# Altium PCB uStepper.PcbDoc (part 2 of 2)
Units mm, origin at the board's own origin, x right, y up, seen from the top; angles counter-clockwise.
Board outline 41.8 x 41.8 mm, 4 copper layers (Top Layer, GND, Vcc, Bottom Layer), stack 1.62 mm thick; 84 components, 62 nets, 292 pads, 387 vias.
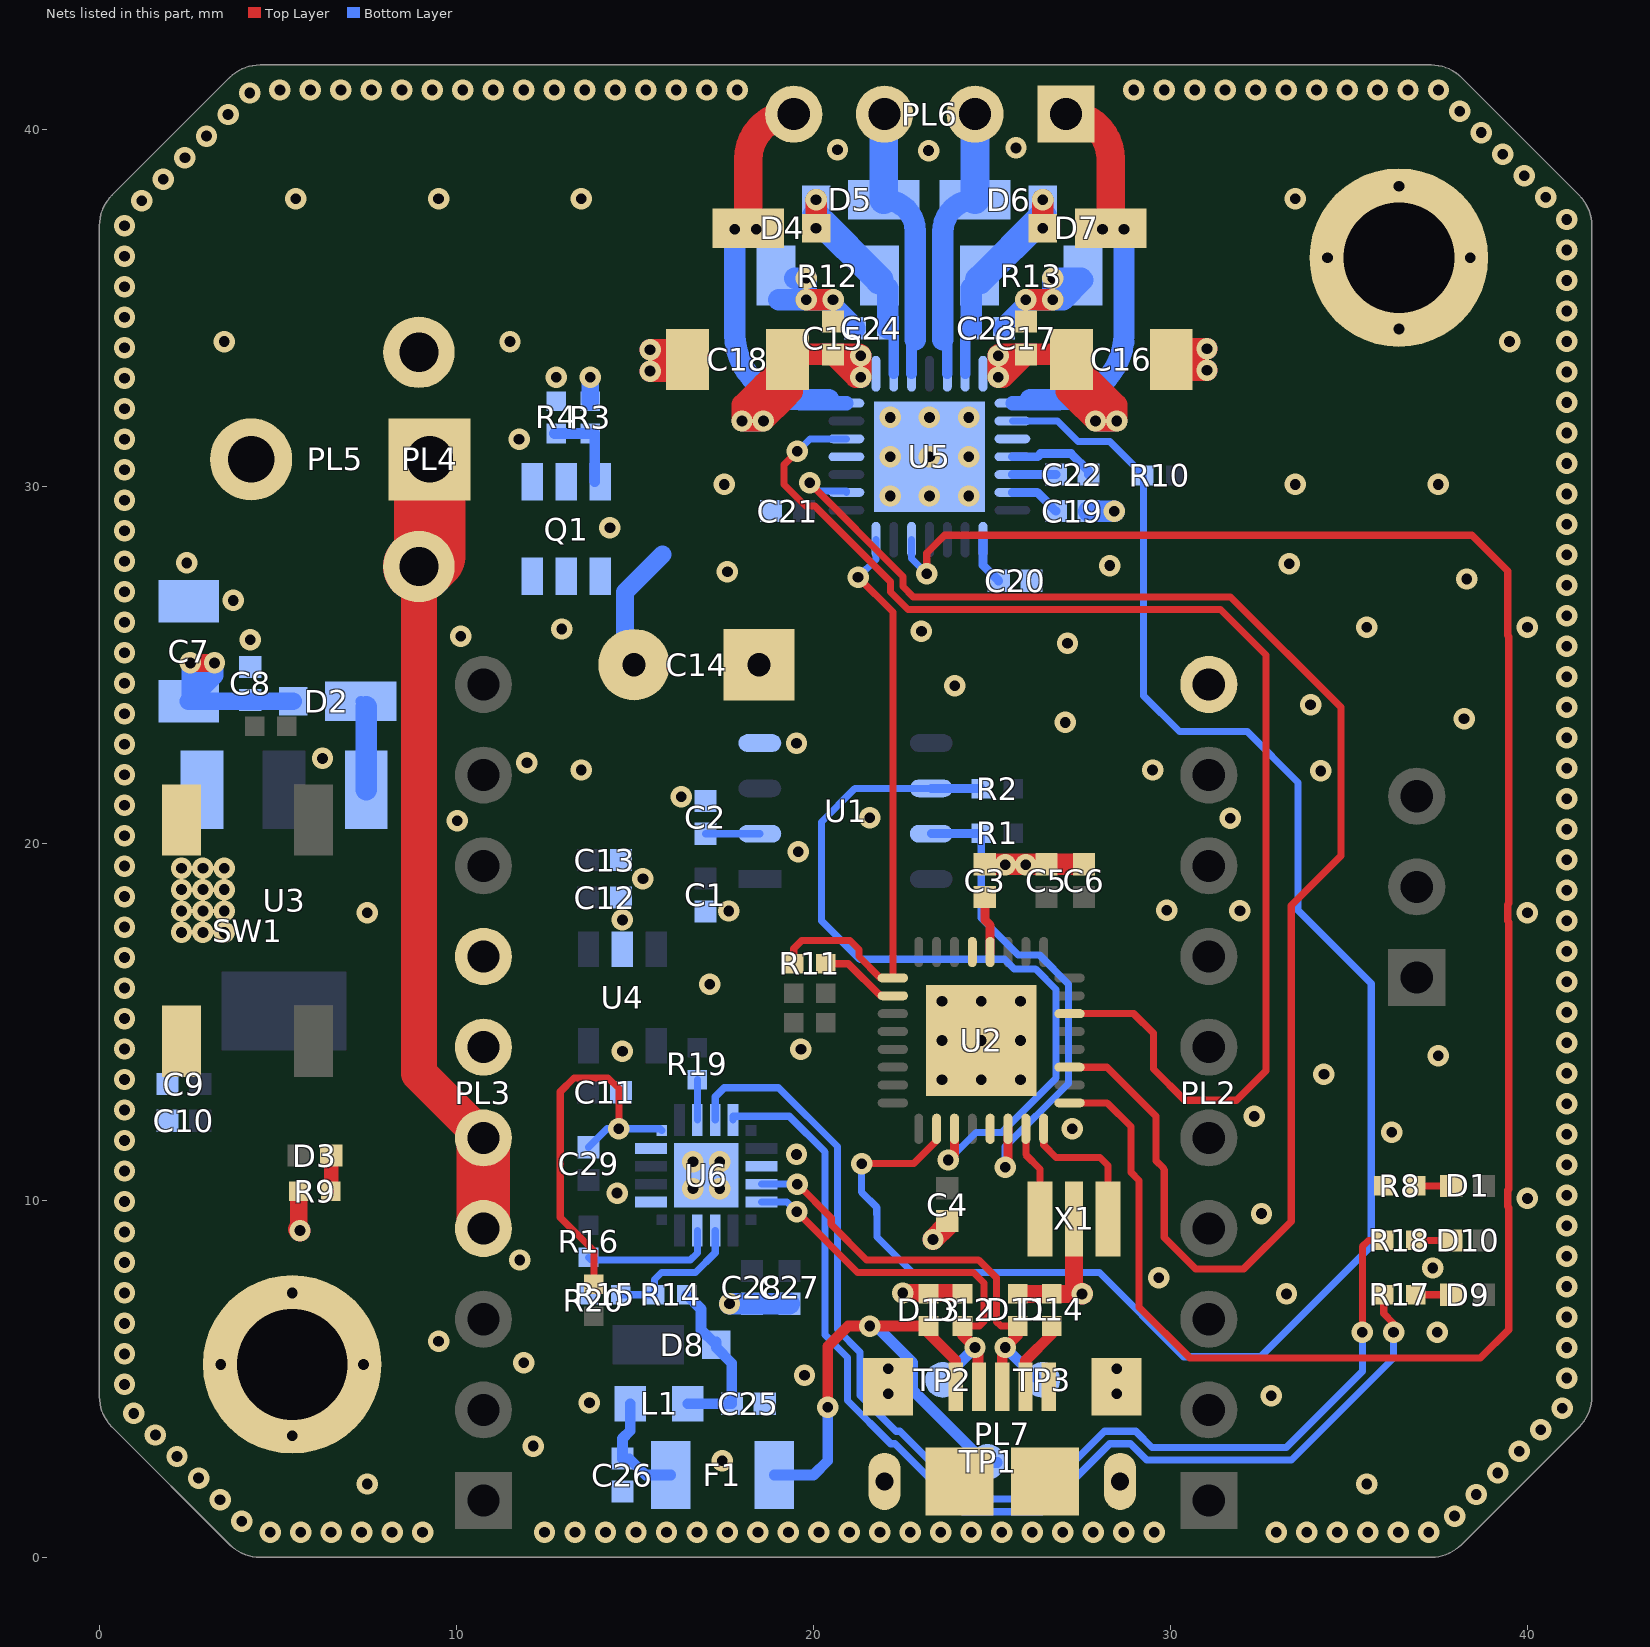
[diagram p4: the nets of this part, all layers, seen from the top]

## Via types
v1: diameter 0.6, hole 0.3, Top Layer to Bottom Layer, tented both sides, 352 vias
v2: diameter 0.6, hole 0.3, Top Layer to Bottom Layer, 18 vias
v3: diameter 0.6, hole 0.3, Top Layer to Bottom Layer, tented bottom, 13 vias
v4: diameter 0.6, hole 0.3, Top Layer to Bottom Layer, tented top, 4 vias

## Nets (pads, with @x,y where several pads share a name; then routed paths per layer and width w, separated by ;. In a path a pad name is that pad's centre, name@x,y a point inside that pad or via, vN(x,y) a via of type N, cw(c..) or ccw(c..) an arc to the next point about the centre after c; other vN are vias at no path point) (continued)
DIR: U2.14 U5.19 | length 37.3
  Top Layer w0.2: v1(19.55,30.974) 19.175,30.599 19.175,30.043 19.775,29.443 20.038,29.443 22.158,27.322 22.158,27.039 22.651,26.547 31.402,26.547 32.677,25.272 32.677,13.627 31.85,12.799 30.4,12.799 29.523,13.677 29.523,14.677 28.975,15.224 U2.14@27.175,15.224
  Bottom Layer w0.2: v1(19.55,30.974) 19.9,31.324 U5.19@20.925,31.324
ENA: R10.1 U2.2 U5.2 | length 51.1
  Top Layer w0.2: v1(21.35,11.024) 22.809,11.024 23.45,11.665 U2.2@23.45,11.999
  Bottom Layer w0.2: v1(21.35,11.024) 21.35,10.224 21.775,9.799 21.775,9.605 21.777,9.603 21.777,8.972 22.775,7.974 28.013,7.974 30.375,5.613 32.523,5.613 35.625,8.715 35.625,16.071 33.575,18.121 33.575,21.699 32.15,23.124 30.25,23.124 29.25,24.124 R10.1@29.25,30.299 28.302,31.247 27.413,31.247 26.836,31.824 U5.2@25.575,31.824
GND: C1.1 C2.1 C3.1 C4.2 C5.1 C6.1 C7.1 C8.1 C9.1 C10.1 C11.1 C12.1 C13.1 C14.2 C15.1 C16.2 C17.1 C18.2 C20.1 C21.1 C23.1 C24.1 C25.1 C26.1 C27.1 C28.1 D11.1 D12.1 D13.1 D14.1 pad.1 pad.3 PL2.10 PL3.6 PL3.7 PL5.2 PL5.3 PL7.5 PL7.6 PL7.7 PL7.8 PL7.9 PL7.10 PL7.11 R4.1 R8.1 R9.1 R12.1 R13.1 R15.1 SW1.3 SW1.4 U1.4 U2.5 U2.21 U2.33 U3.1 U4.2 U5.3 U5.18 U5.29 U6.3 U6.12 U6.15 U6.21 X1.2 | length 28
  Top Layer w0.2: U2.33@24.45,14.724 v3(24.7,14.474) U2.33@24.95,14.224
  Top Layer w0.5: v1@5.585,9.182 R9.1@5.585,10.249 ; v1(22.5,7.399) 24.15,7.399 D12.1@24.175,7.374 ; D11.1@25.725,7.374 v1(27.525,7.374) 27.3,7.599 X1.2@27.3,9.474
  Top Layer w0.6: v1@5.585,9.182 v1(5.618,9.149) ; v1(15.425,33.224) 16.15,33.224 C18.2@16.475,33.549 16.2,33.824 v1(15.425,33.824) ; v1(19.8,35.224) v1(20.55,35.224) ; v1(23.35,8.899) 23.75,9.299 C4.2@23.75,9.414 ; C3.1@24.8,19.409 C6.1@27.574,19.409 ; v1(25.95,35.224) v1(26.7,35.224) ; v1(31.025,33.249) 30.325,33.249 C16.2@30.025,33.549 30.325,33.849 v1(31.025,33.849)
  Bottom Layer w0.6: v1(17.65,7.099) C28.1@18.277,7.099 C27.1@19.327,7.099 ; R12.1@19.025,35.224 v1(19.8,35.224) ; R12.1@19.475,35.824 v1(19.8,35.824) v1(19.8,35.224) ; C24.1@21.165,34.424 20.55,35.039 v1(20.55,35.224) v1(19.8,35.224) ; v3(22.1,4.574) v3(22.1,5.274) ; C23.1@25.335,34.424 25.95,35.039 v1(25.95,35.224) v1(26.7,35.224) ; v3(28.5,4.574) v3(28.5,5.274) ; v1(26.7,35.224) v1(26.7,35.824) 27.5,35.824 27.55,35.774 27,35.224 v1(26.7,35.224)
  other v1: 4.782,0.702 5.636,0.702 6.49,0.702 7.344,0.702 8.198,0.702 9.052,0.702 12.468,0.702 13.322,0.702 14.176,0.702 15.03,0.702 15.884,0.702 16.738,0.702 17.592,0.702 18.446,0.702 19.3,0.702 20.154,0.702 21.008,0.702 21.862,0.702 22.716,0.702 23.57,0.702 24.424,0.702 25.278,0.702 26.132,0.702 26.986,0.702 27.84,0.702 28.694,0.702 29.548,0.702 32.964,0.702 33.818,0.702 34.672,0.702 35.526,0.702 36.38,0.702 37.234,0.702 3.985,1.008 37.96,1.152 3.381,1.612 38.563,1.756 7.5,2.049 35.5,2.049 2.777,2.215 39.167,2.36 17.45,2.699 2.173,2.819 39.771,2.964 12.15,3.111 1.569,3.423 40.375,3.567 0.965,4.027 40.979,4.171 13.725,4.324 32.825,4.524 0.702,4.839 41.098,5.017 19.75,5.099 11.889,5.449 0.702,5.693 41.098,5.871 9.5,6.049 37.475,6.299 0.702,6.547 41.098,6.725 33.25,7.374 0.702,7.401 41.098,7.579 29.675,7.824 37.35,8.099 0.702,8.255 11.775,8.324 41.098,8.433 0.702,9.109 41.098,9.287 32.55,9.624 0.702,9.963 40,10.049 41.098,10.141 14.5,10.199 0.702,10.817 41.098,10.995 19.525,11.281 0.702,11.671 41.098,11.849 36.2,11.899 27.25,11.999 32.35,12.349 0.702,12.525 41.098,12.703 0.702,13.379 34.3,13.524 41.098,13.557 37.5,14.049 14.65,14.174 0.702,14.233 19.65,14.224 41.098,14.411 0.702,15.087 41.098,15.265 0.702,15.941 17.1,16.049 41.098,16.119 0.702,16.795 41.098,16.973 2.3,17.499 2.9,17.499 3.5,17.499 0.702,17.649 41.098,17.827 14.65,17.849 7.5,18.049 40,18.049 2.3,18.099 2.9,18.099 3.5,18.099 17.625,18.099 29.9,18.124 31.947,18.109 0.702,18.503 41.098,18.681 2.3,18.699 2.9,18.699 3.5,18.699 15.225,18.999 2.3,19.299 2.9,19.299 3.5,19.299 0.702,19.357 25.375,19.399 25.95,19.399 41.098,19.535 19.575,19.763 0.702,20.211 41.098,20.389 10.025,20.624 21.575,20.71 31.675,20.699 0.702,21.065 41.098,21.243 16.3,21.299 0.702,21.919 34.214,22.024 13.5,22.049 29.5,22.049 41.098,22.097 11.975,22.249 6.25,22.374 0.702,22.773 19.525,22.799 41.098,22.951 27.05,23.382 38.225,23.485 0.702,23.627 41.098,23.805 33.925,23.875 23.962,24.406 0.702,24.481 41.098,24.659 0.702,25.335 41.098,25.513 27.116,25.599 4.225,25.699 10.125,25.799 23.025,25.938 12.95,25.999 35.5,26.049 40,26.049 0.702,26.189 41.098,26.367 3.75,26.799 0.702,27.043 41.098,27.221 38.3,27.399 17.591,27.599 28.3,27.775 33.325,27.824 2.45,27.849 0.702,27.897 41.098,28.075 0.702,28.751 14.3,28.837 41.098,28.929 0.702,29.605 41.098,29.783 17.5,30.049 33.5,30.049 37.5,30.049 0.702,30.459 41.098,30.637 0.702,31.313 11.755,31.313 41.098,31.491 0.702,32.167 41.098,32.345 0.702,33.021 12.8,33.049 41.098,33.199 0.702,33.875 3.5,34.049 11.5,34.049 39.5,34.049 41.098,34.053 0.702,34.729 41.098,34.907 0.702,35.583 41.098,35.761 0.702,36.437 41.098,36.615 0.702,37.291 41.098,37.469 1.188,37.994 5.5,38.049 9.5,38.049 13.5,38.049 33.5,38.049 40.514,38.092 1.792,38.598 39.91,38.696 2.396,39.202 39.306,39.3 23.225,39.399 20.675,39.424 25.675,39.474 3,39.806 38.702,39.904 3.603,40.409 38.1,40.499 4.207,41.013 5.057,41.097 5.911,41.097 6.765,41.097 7.619,41.097 8.473,41.097 9.327,41.097 10.181,41.097 11.035,41.097 11.889,41.097 12.743,41.097 13.597,41.097 14.451,41.097 15.305,41.097 16.159,41.097 17.013,41.097 17.867,41.097 28.969,41.097 29.823,41.097 30.677,41.097 31.531,41.097 32.385,41.097 33.239,41.097 34.093,41.097 34.947,41.097 35.801,41.097 36.655,41.097 37.509,41.097
  other v2: 5.4,3.399 3.4,5.399 7.4,5.399 5.4,7.399 22.15,29.724 23.25,29.724 24.35,29.724 22.15,30.824 23.25,30.824 24.35,30.824 22.15,31.924 23.25,31.924 24.35,31.924 36.4,34.399 34.4,36.399 38.4,36.399 36.4,38.399
  other v3: 23.6,13.374 24.7,13.374 25.8,13.374 23.6,14.474 25.8,14.474 23.6,15.574 24.7,15.574 25.8,15.574
  other v4: 16.625,10.324 17.375,10.324 16.625,11.074 17.375,11.074
INDEX: U2.9 U5.12 | length 58.3
  Top Layer w0.2: v1(23.175,27.549) 23.175,28.124 23.675,28.624 38.45,28.624 39.448,27.627 39.448,25.82 39.475,25.793 39.475,18.305 39.448,18.278 39.448,17.82 39.475,17.793 39.475,10.305 39.448,10.278 39.448,9.82 39.475,9.793 39.475,6.371 38.688,5.584 30.54,5.584 29.123,7.002 29.123,10.553 28.893,10.783 28.893,12.06 28.228,12.724 U2.9@27.175,12.724
  Bottom Layer w0.2: U5.12@22.75,28.499 22.75,27.974 v1(23.175,27.549)
NetC2_2: C2.2 U1.2 | length 1.5
  Bottom Layer w0.2: C2.2@16.975,20.264 U1.2@18.5,20.264
NetC3_2: C3.2 U2.20 | length 1.6
  Top Layer w0.25: C3.2@24.8,18.489 24.8,17.849 24.95,17.699 U2.20@24.95,16.949
NetC19_2: C19.2 U5.6 | length 1.4
  Bottom Layer w0.25: U5.6@25.575,29.824 26.265,29.824 C19.2@26.79,29.299
NetC20_2: C20.2 U5.8 | length 1.3
  Bottom Layer w0.25: U5.8@24.75,28.499 24.75,27.789 C20.2@25.19,27.349
NetC22_1: C22.1 U5.4 | length 2.5
  Bottom Layer w0.25: U5.4@25.575,30.824 26.278,30.824 26.365,30.912 27.215,30.912 27.71,30.417 C22.1@27.71,30.324
NetC22_2: C22.2 U5.5 | length 1.2
  Bottom Layer w0.25: U5.5@25.575,30.324 C22.2@26.79,30.324
NetC23_2: C23.2 D6.1 D7.1 R13.2 U5.27 | length 7
  Top Layer w0.6: v1(26.425,37.224) v1(26.425,38.024)
  Bottom Layer w0.3: U5.27@24.25,33.149 C23.2@24.25,34.549
  Bottom Layer w0.6: C23.2@24.415,34.424 24.415,35.539 R13.2@24.65,35.774 ; v1(26.425,37.224) 26.425,37.549 v1(26.425,38.024)
  Bottom Layer w0.8: R13.2@24.65,35.774 26.425,37.549
NetC24_2: C24.2 D4.1 D5.1 R12.2 U5.23 | length 7.1
  Top Layer w0.6: v1(20.075,37.224) v1(20.075,38.024)
  Bottom Layer w0.3: U5.23@22.25,33.149 C24.2@22.25,34.724
  Bottom Layer w0.6: v1(20.075,37.224) 20.075,37.549 v1(20.075,38.024) ; R12.2@21.85,35.774 22.085,35.539 C24.2@22.085,34.424
  Bottom Layer w0.8: 20.075,37.549 R12.2@21.85,35.774
NetC26_2: C26.2 F1.1 L1.2 | length 3.2
  Bottom Layer w0.3: L1.2@14.87,4.299 14.87,3.544 14.65,3.324 C26.2@14.65,2.759 14.84,2.759 15.3,2.299 F1.1@16,2.299
NetC29_1: C29.1 R20.1 U6.16 | length 11.1
  Top Layer w0.2: R20.1@13.85,7.649 13.85,8.574 12.907,9.517 12.907,13.039 13.292,13.424 14.25,13.424 14.55,13.124 v2(14.55,11.999)
  Bottom Layer w0.2: C29.1@13.7,11.484 14.215,11.999 v2(14.55,11.999) 15.7,11.999 U6.16@15.75,11.949
NetD1_2: D1.2 R8.2 | length 1
  Top Layer w0.2: R8.2@36.875,10.399 D1.2@37.865,10.399
NetD2_2: D2.2 U3.3 | length 2.5
  Bottom Layer w0.3: D2.2@7.325,23.974 D2.2@7.475,23.824
  Bottom Layer w0.6: U3.3@7.475,21.499 D2.2@7.475,23.824
NetD3_2: D3.2 R9.2 | length 1
  Top Layer w0.4: R9.2@6.485,10.249 6.495,10.259 D3.2@6.495,11.249
NetD4_2: D4.2 PL6.4 U5.21 | length 11.8
  Top Layer w0.6: 18.175,39.154 18.175,39.224
  Top Layer w0.8: D4.2@18.175,37.224 18.175,39.154 cw(c19.445,39.154) 19.445,40.424 PL6.4@19.45,40.419
  Bottom Layer w0.4: 20.425,32.424 ccw(c20.525,32.424) 20.525,32.324 U5.21@20.925,32.324
  Bottom Layer w0.6: v1(18.4,37.199) v1(17.8,37.199) 17.8,34.249 ccw(c19.625,34.249) 19.625,32.424 20.425,32.424
NetD5_2: D5.2 PL6.3 U5.24 | length 7.9
  Top Layer w0.8: PL6.3@21.975,40.414 PL6.3@21.985,40.424
  Bottom Layer w0.3: U5.24@22.75,33.149 22.75,33.999 cw(c22.852,33.999) 22.852,34.102
  Bottom Layer w0.6: D5.2@21.975,38.024 cw(c21.975,37.147) 22.852,37.147 22.852,34.102 ; PL6.3@21.975,40.424 PL6.3@21.985,40.424
  Bottom Layer w0.8: D5.2@21.975,38.024 PL6.3@21.975,40.424
NetD6_2: D6.2 PL6.2 U5.26 | length 7.8
  Top Layer w0.8: PL6.2@24.515,40.434 PL6.2@24.525,40.424
  Bottom Layer w0.3: 23.625,34.102 cw(c23.625,33.977) 23.75,33.977 U5.26@23.75,33.149
  Bottom Layer w0.6: 23.625,34.102 23.625,37.074 ; 23.625,37.124 cw(c24.525,37.124) D6.2@24.525,38.024
  Bottom Layer w0.8: D6.2@24.525,38.024 PL6.2@24.525,40.424
NetD7_2: D7.2 PL6.1 U5.1 | length 11.6
  Top Layer w0.8: PL6.1@27.075,40.414 PL6.1@27.07,40.419 27.065,40.424 cw(c27.065,39.164) 28.325,39.164 D7.2@28.325,37.224
  Bottom Layer w0.4: U5.1@25.575,32.324 U5.1@25.975,32.324
  Bottom Layer w0.6: 26.075,32.424 26.875,32.424 ccw(c26.875,34.249) 28.7,34.249 v1(28.7,37.199) v1(28.1,37.199)
NetD9_2: D9.2 R17.1 | length 1
  Top Layer w0.2: R17.1@36.875,7.349 D9.2@37.865,7.349
NetD10_2: D10.2 R18.1 | length 1
  Top Layer w0.2: R18.1@36.875,8.874 D10.2@37.865,8.874
NetD13_2: D13.2 F1.2 PL7.1 TP1.1 | length 15.6
  Top Layer w0.3: v1(20.4,4.199) 20.4,5.899 20.975,6.474 D13.2@23.225,6.474 23.225,6.274 23.99,5.509 PL7.1@23.99,4.774
  Bottom Layer w0.3: F1.2@18.9,2.299 20,2.299 20.4,2.699 v1(20.4,4.199) ; v1(21.575,6.474) 21.752,6.474 22.775,5.451 22.775,4.68 24.806,2.649 TP1.1@25.15,2.649
NetD14_2: D14.2 PL7.4 | length 2
  Top Layer w0.3: PL7.4@25.94,4.774 25.94,5.507 26.675,6.242 D14.2@26.675,6.474
NetQ1_3: Q1.3 R3.1 R4.2 | length 2.4
  Bottom Layer w0.3: R4.2@12.75,31.474 R4.2@12.9,31.474 ; R4.2@12.8,31.474 R3.1@13.75,31.474 ; Q1.3@13.875,30.124 R3.1@13.875,31.474
NetR14_1: R14.1 R15.2 U6.8 | length 4
  Bottom Layer w0.2: R15.2@14.6,7.349 R14.1@15.55,7.349 15.55,7.774 15.748,7.972 16.696,7.972 17.25,8.526 U6.8@17.25,9.149
NetR16_1: R16.1 U6.9 | length 3.8
  Bottom Layer w0.2: R16.1@13.7,8.399 13.775,8.324 16.55,8.324 16.75,8.524 U6.9@16.75,9.149
NetR17_2: R17.2 U6.20 | length 30.9
  Top Layer w0.2: R17.2@35.975,7.349 35.975,6.824 36.25,6.549 v1(36.25,6.299)
  Bottom Layer w0.2: U6.20@17.75,12.249 17.75,12.352 19.323,12.352 20.32,11.354 20.32,6.229 20.952,5.597 20.952,4.39 22.166,3.177 22.281,3.177 24.183,1.274 26.397,1.274 28.299,3.177 28.881,3.177 29.337,2.72 33.389,2.72 36.25,5.582 v1(36.25,6.299)
NetR18_2: R18.2 U6.19 | length 33.4
  Top Layer w0.2: v1(35.375,6.299) 35.375,8.699 35.55,8.874 R18.2@35.975,8.874
  Bottom Layer w0.2: U6.19@17.25,12.249 17.25,12.899 17.5,13.149 19.023,13.149 20.673,11.5 20.673,6.375 21.305,5.743 21.305,4.536 22.312,3.529 22.427,3.529 24.329,1.627 26.251,1.627 28.153,3.529 29.027,3.529 29.483,3.073 33.243,3.073 35.375,5.205 v1(35.375,6.299)
NetR19_1: R19.1 U6.18 | length 1.1
  Bottom Layer w0.2: U6.18@16.75,12.249 R19.1@16.75,13.374
NetU2_7: U2.7 X1.1 | length 2.7
  Top Layer w0.2: U2.7@25.95,11.999 25.95,11.274 26.35,10.874 X1.1@26.35,9.474
NetU2_8: U2.8 X1.3 | length 4
  Top Layer w0.2: U2.8@26.45,11.999 26.45,11.546 26.797,11.199 28.025,11.199 28.25,10.974 X1.3@28.25,9.474
PD7: U2.11 U5.16 | length 44.8
  Top Layer w0.2: v1(19.9,30.099) 19.9,30.079 22.511,27.468 22.511,27.185 22.797,26.899 31.682,26.899 34.775,23.806 34.775,19.649 33.382,18.256 33.382,9.405 32.054,8.077 30.702,8.077 29.827,8.951 29.827,10.845 29.802,10.871 29.802,10.899 29.598,11.103 29.598,12.352 28.225,13.724 U2.11@27.175,13.724
  Bottom Layer w0.2: v1(19.9,30.099) 20.138,29.862 20.925,29.862 U5.16@20.925,29.824
RXD_IN: R11.1 U2.25 U5.14 | length 16.7
  Top Layer w0.2: R11.1@19.45,16.624 19.45,17.049 19.675,17.274 21.025,17.274 21.275,17.024 21.275,16.823 21.873,16.224 U2.25@22.225,16.224 22.225,26.474 v1(21.25,27.449)
  Bottom Layer w0.2: v1(21.25,27.449) 21.75,27.949 U5.14@21.75,28.499
SCL1: R1.1 U1.7 U2.6 | length 14
  Top Layer w0.25: v1(25.375,10.924) 25.45,10.999 U2.6@25.45,11.999
  Bottom Layer w0.2: R1.1@24.7,20.274 24.7,17.901 25.729,16.872 26.326,16.872 27.148,16.05 27.148,13.272 25.375,11.499 v1(25.375,10.924)
  Bottom Layer w0.25: U1.7@23.3,20.264 23.31,20.274 R1.1@24.7,20.274
SDA1: R2.1 U1.6 U2.3 | length 22.4
  Top Layer w0.25: v1(23.775,11.124) 23.95,11.299 U2.3@23.95,11.999
  Bottom Layer w0.2: U1.6@23.3,21.534 21.16,21.534 20.223,20.597 20.223,17.827 21.3,16.749 25.35,16.749 25.625,16.474 26.225,16.474 26.795,15.904 26.795,13.418 25.277,11.899 24.55,11.899 v1(23.775,11.124)
  Bottom Layer w0.25: U1.6@23.3,21.534 24.69,21.534 R2.1@24.7,21.524
TXD_IN: R11.2 U2.26 | length 2.2
  Top Layer w0.2: R11.2@20.35,16.624 20.975,16.624 21.875,15.724 U2.26@22.225,15.724
USB_N: D12.2 PL7.2 TP2.1 U6.5 | length 12
  Top Layer w0.2: v1@19.639,9.68 v1(19.532,9.68) 21.237,7.974 24.482,7.974 24.775,7.681 24.775,6.599 24.65,6.474 D12.2@24.175,6.474
  Top Layer w0.3: D12.2@24.175,6.474 24.175,6.224 v1(24.525,5.874) 24.61,5.789 PL7.2@24.61,4.774
  Bottom Layer w0.2: U6.5@18.55,9.949 19.262,9.949 v1(19.532,9.68)
  Bottom Layer w0.3: TP2.1@23.882,5.04 23.882,5.231 v1(24.525,5.874)
USB_P: D11.2 PL7.3 TP3.1 U6.4 | length 12.7
  Top Layer w0.2: v1(19.55,10.449) 20.5,9.499 20.5,9.318 21.491,8.327 24.628,8.327 25.128,7.827 25.128,6.596 25.25,6.474 D11.2@25.725,6.474
  Top Layer w0.3: PL7.3@25.29,4.774 25.29,5.789 v1(25.375,5.874) 25.725,6.224 D11.2@25.725,6.474
  Bottom Layer w0.2: U6.4@18.55,10.449 v1(19.55,10.449)
  Bottom Layer w0.3: v1(25.375,5.874) TP3.1@26.209,5.04
VIN: PL3.4 PL3.5 PL4.1 PL5.1 Q1.1 Q1.2 Q1.5 Q1.6 | length 22.4
  Top Layer w1: PL5.1@8.95,27.749 8.95,13.55 PL3.5@10.755,11.745
  Top Layer w1.5: PL3.4@10.755,9.205 PL3.5@10.755,11.745
  Top Layer w2: PL5.1@8.95,27.749 9.25,28.049 PL4.1@9.25,30.749
VIN_PROTECT: C7.2 C8.2 C14.1 C15.2 C16.1 C17.2 C18.1 C19.1 D2.1 Q1.4 R3.2 U5.22 U5.28 | length 37.2
  Top Layer w0.5: v1(2.55,25.049) v1(3.225,25.049)
  Top Layer w0.6: v1(18.6,31.824) 18.6,32.574 ; v1(18.6,31.824) v1(18,31.824) 18,32.274 18.6,32.874 ; v1(18.6,31.824) 19.225,32.449 ; 18.6,32.574 18.6,32.874 ; 18.6,32.574 18.725,32.449 19.225,32.449 ; 18.6,32.874 C18.1@19.275,33.549 ; 18.6,32.874 19.18,32.874 19.415,32.639 ; 19.225,32.449 19.415,32.639 ; C18.1@19.275,33.549 cw(c19.415,33.549) C18.1@19.415,33.689 ; C18.1@19.275,33.549 C18.1@19.415,33.689 ; 19.415,32.639 C18.1@19.415,33.689 ; C18.1@19.415,33.689 C15.2@20.55,33.689 ; C15.2@20.55,33.689 21.19,33.049 v1(21.325,33.049) v1(21.325,33.649) ; C15.2@20.55,33.689 v1@21.285,33.689 ; v1@21.285,33.689 cw(c21.285,33.649) v1(21.325,33.649) ; v1@21.285,33.689 cw(c21.285,33.649) v1(21.325,33.649) ; C17.2@25.95,33.689 C16.1@27.085,33.689 ; C17.2@25.95,33.689 25.215,33.689 ccw(c25.215,33.649) v1(25.175,33.649) v1(25.175,33.049) 25.31,33.049 C17.2@25.95,33.689 ; 27.085,32.639 C16.1@27.085,33.689 ; 27.085,32.639 27.275,32.449 ; 27.085,32.639 27.32,32.874 27.9,32.874 ; C16.1@27.085,33.689 cw(c27.085,33.549) C16.1@27.225,33.549 ; C16.1@27.085,33.689 cw(c27.085,33.549) C16.1@27.225,33.549 ; C16.1@27.085,33.689 C16.1@27.225,33.549 ; C16.1@27.225,33.549 27.9,32.874 ; 27.275,32.449 v1(27.9,31.824) ; 27.275,32.449 27.775,32.449 27.9,32.574 ; v1(27.9,31.824) 27.9,32.574 ; v1(27.9,31.824) v1(28.5,31.824) 28.5,32.274 27.9,32.874 ; 27.9,32.574 27.9,32.874
  Bottom Layer w0.5: D2.1@5.425,23.974 C7.2@2.5,23.974 C7.2@2.55,24.024 ; R3.2@13.75,32.374 v1(13.75,33.049) ; C14.1@14.975,24.999 14.725,25.249 14.725,27.032 15.775,28.082 ; C7.2@2.55,24.024 v1(2.55,25.049) 2.888,25.049 ; C7.2@2.55,24.024 C7.2@2.888,24.362 ; C7.2@2.888,24.362 2.888,25.049 ; C7.2@2.888,24.362 3.225,24.699 v1(3.225,25.049) 2.888,25.049
  Bottom Layer w0.6: v1(18,31.824) v1(18.6,31.824) ; C19.1@27.71,29.299 v1(28.425,29.299) ; v1(27.9,31.824) v1(28.5,31.824)
VUSB: C25.2 D8.1 L1.1 R14.2 | length 4.8
  Bottom Layer w0.3: R14.2@16.45,7.349 16.85,6.949 16.85,6.374 D8.1@17.275,5.949 D8.1@17.275,6.027 ; L1.1@16.48,4.299 C25.2@17.715,4.299 17.715,5.432 D8.1@17.275,5.872
pads on no net: U1.3 U1.5 U1.8 U4.4 U5.7 U5.11 U5.17 U5.20 U5.25 U6.1 U6.2 U6.10 U6.11 U6.13 U6.14

## Polygon pours and split planes (outlines as drawn)
GND on Bottom Layer "Btm Layer-GND" (solid, remove dead copper, pour order 24): 37.606,-0.2 41.606,3.8 41.606,37.6 37.606,41.6 3.806,41.6 -0.194,37.6 -0.194,3.8 3.806,-0.2
VIN on Bottom Layer "VIN_POLY_BOT" (solid, remove dead copper, pour order 22): 7.9,26.699 10.6,26.699 13.4,26.699 13.4,30.637 10.6,30.637 10.6,32.099 7.9,32.099
GND on Top Layer "Top Layer-GND" (solid, remove dead copper, pour order 26): 37.8,-0.001 41.8,3.999 41.8,37.799 37.8,41.799 4,41.799 0,37.799 0,3.999 4,-0.001
GND on GND (split plane): 37.409,41.282 37.516,41.257 37.617,41.215 37.711,41.157 37.785,41.094 37.793,41.085 41.086,37.792 41.095,37.784 41.158,37.71 41.215,37.616 41.257,37.515 41.283,37.409 41.291,37.311 41.29,37.299 41.29,4.499 41.291,4.487 41.283,4.39 41.257,4.283 41.215,4.182 41.158,4.088 41.097,4.017 41.09,4.011 37.788,0.709 37.782,0.702 37.711,0.641 37.617,0.584 37.516,0.542 37.409,0.516 37.315,0.509 37.306,0.51 4.494,0.51 4.485,0.509 4.391,0.516 4.284,0.542 4.183,0.584 4.089,0.641 4.018,0.702 4.012,0.709 0.71,4.011 0.703,4.017 0.642,4.088 0.585,4.182 0.543,4.283 0.517,4.39 0.509,4.487 0.51,4.499 0.51,37.299 0.509,37.311 0.517,37.409 0.543,37.515 0.585,37.616 0.642,37.71 0.705,37.784 0.714,37.792 4.007,41.085 4.015,41.094 4.089,41.157 4.183,41.215 4.284,41.257 4.391,41.282 4.488,41.29 4.5,41.289 37.3,41.289 37.312,41.29
+5V on Vcc (split plane): 40.598,4.473 37.326,1.201 4.374,1.201 1.202,4.373 1.202,23.422 16.425,23.422 16.477,23.429 16.526,23.45 16.568,23.482 21.359,28.272 40.598,28.272
VIN_PROTECT on Vcc (split plane): 40.598,37.326 40.598,28.676 21.275,28.676 21.223,28.669 21.174,28.649 21.132,28.617 16.341,23.826 1.202,23.826 1.202,37.326 4.523,40.647 37.277,40.647

## Keep-outs
Top Layer:
  lines w0.1: 14.284,8.368 14.475,8.585
  lines w0.153: 19.55,6.131 20.018,6.131 ; 21.323,10.001 21.323,10.417 ; 21.5,12.173 21.5,12.174 ; 28.125,19.424 28.125,19.449 ; 31.05,2.899 31.05,2.949 ; 32.112,16.774 32.25,16.774
Bottom Layer:
  lines w0.153: 13.975,15.074 13.975,15.149 ; 15.275,3.549 15.3,3.524 ; 15.35,15.099 15.35,15.174 ; 16.225,5.074 16.25,5.074 ; 19.103,31.474 19.103,31.477 19.125,31.499 ; 19.825,3.324 19.85,3.299 ; 20.725,38.374 20.725,38.424 ; 23.25,38.524 23.25,38.574 ; 25.775,38.374 25.775,38.424 ; 29.625,27.949 29.625,28.024
Keep-Out Layer:
  the board outline again, w0.254

## Other copper
Bottom Layer:
  rectangle net 3V3: 17.6,8.699 18.4,9.599
  rectangle net +5V: 2.375,9.674 7.115,16.909
  rectangle net VIN_PROTECT: 13.7,23.949 16,27.999
  rectangle net VIN_PROTECT: 21.025,32.749 21.875,33.949
  region net VIN_PROTECT: 25.475,33.949 24.625,33.949 24.625,32.749 25.475,32.749
Vcc (plane layer: these items are gaps in the copper):
  pour cut-out: 17.15,10.874 17.15,10.574 16.85,10.574 16.85,10.874
  pour cut-out: 21.625,33.874 21.625,32.799 21.05,32.799 21.05,33.874
  pour cut-out: 25.475,33.874 25.475,32.799 24.9,32.799 24.9,33.874
  lines w0.4: -0.35,23.624 16.425,23.624 21.275,28.474 42.1,28.474
  lines w1.5: 4,41.399 37.8,41.399
  lines w1.8: 4,41.399 0.3,37.699 0.3,3.999 4,0.299 37.7,0.299 41.5,4.099 41.5,37.699 37.8,41.399

## Silkscreen, mask and mechanical layers (free items; w line width, h text height)
Top Overlay:
  lines w0.125: 7.95,14.324 8.45,14.324 ; 7.95,16.849 8.45,16.849 ; 8.2,14.074 8.45,14.074 8.7,14.074 ; 8.2,16.599 8.45,16.599 8.7,16.599 ; 8.4,13.824 8.45,13.824 8.5,13.824 ; 8.4,16.349 8.45,16.349 8.5,16.349 ; 8.45,14.924 8.45,14.324 ; 8.45,17.449 8.45,16.849 ; 8.95,14.324 8.45,14.324 ; 8.95,16.849 8.45,16.849 ; 32.825,24.449 33.325,24.449 ; 33.075,24.199 33.325,24.199 33.575,24.199 ; 33.275,23.949 33.325,23.949 33.375,23.949 ; 33.325,25.049 33.325,24.449 ; 33.825,24.449 33.325,24.449
  lines w0.153: 1.975,10.124 2.95,10.124 ; 2.35,10.124 1.85,10.124 ; 4.55,9.024 6.625,9.024 9,6.649 9.45,6.649 ; 6.275,1.824 6.6,1.824 8.55,3.774 8.95,3.774 9.5,3.774 ; 12.5,24.849 13.7,24.849 ; 13.1,24.249 13.1,25.449 ; 0.85,9.124 1.85,10.124 ; 0.85,9.124 0.85,8.124 4.5,8.124 4.5,10.124 1.85,10.124 ; 0.85,9.124 1.85,10.124 ; 2.725,1.474 2.725,2.524 6.275,2.524 6.275,0.449 3.75,0.449 2.725,1.474 ; 21.375,28.974 25.1,28.974 25.1,32.699 21.375,32.699 21.375,28.974
  text "SUPPLY: 6.5V - 12V" at 14.275,40.724 h1.25 r270
  text "GND" at 5.2,33.549 h1.25
  text "GND" at 4.125,32.324 h1.25
  text "x" at 21.125,32.174 h6
  text "uStepper" at 28.961,30.624 h3
  text "VIN" at 7.65,28.249 h1.25 r90
  text "-lite" at 34.225,28.199 h3
  text "S" at 31.825,28.167 h4
  text "RST" at 7.395,24.113 h1.25
  text "RESET" at 2.561,21.974 h1.25
  text "3V3" at 7.24,21.574 h1.25
  text "E" at 21.625,21.099 h9
  text "A3 / SDA0" at 32.628,21.039 h1.25
  text "AUX3*" at 38.8,20.949 h1.25 r40
  text "5V" at 7.812,19.03 h1.25
  text "A4 / SCL0" at 32.631,18.741 h1.25
  text "AUX2*" at 38.8,18.204 h1.25 r40
  text "D6 / SCK0" at 32.628,16.195 h1.25
  text "AUX1 / A5" at 39.381,15.449 h1.25 r40
  text "D5 / MISO0/RX1" at 32.637,13.656 h1.25
  text "PWR" at 4.575,11.874 h1.25
  text "VIN" at 7.325,11.424 h1.25
  text "D4* / MOSI0/TX1" at 32.622,11.124 h1.25
  text "L" at 39.5,10.074 h1.25
  text "VIN" at 7.325,8.899 h1.25
  text "D3* / INT0" at 32.638,8.578 h1.25
  text "RX" at 39.5,8.474 h1.25
  text "A0 / MOSI1" at 1.025,8.324 h1.25
  text "TX" at 39.49,7.024 h1.25
  text "D2* / INT1" at 32.636,6.043 h1.25
  text "D1* / TX0" at 32.635,3.258 h1.25
  text "A2 / SCK1" at 6.025,0.728 h1.25
  text "D0* / RX0" at 32.625,0.728 h1.25
  text "MISO1 / A1" at 2.875,0.624 h1.25
Bottom Overlay:
  text "Rev. 1.0" at 16.525,39.649 h2
  text "P" at 7.35,33.324 h6
  text "R" at 10.875,33.274 h8
  text "By ON Development" at 40.45,28.999 h2 r90
Top Solder:
  rectangle: 21.675,29.274 24.8,32.374
Board outline:
  the board outline again, w0.254
Mechanical 4:
  circle w0.254: c20.9,20.899 r2.5
  lines w0.153: 5.4,5.399 20.9,20.899
Mechanical 30:
  circle w0.013: c36.408,36.418 r1.6
  circle w0.013: c5.406,5.418 r1.6
  circle w0.254: c36.4,36.399 r3.002
  circle w0.254: c5.4,5.399 r3.002
  lines w0.013: -2.194,6.018 ccw(c-0.194,6.018) -0.194,4.018 ; -2.194,6.018 ccw(c-0.194,6.018) -0.194,4.018 ; -2.194,6.018 -2.194,35.818 ; -2.194,6.018 -2.194,35.818 ; -2.194,35.818 cw(c-0.194,35.818) -0.194,37.818 ; -2.194,35.818 cw(c-0.194,35.818) -0.194,37.818 ; -0.194,4.018 0.006,4.018 ; -0.194,4.018 0.006,4.018 ; -0.194,37.818 0.006,37.818 ; -0.194,37.818 0.006,37.818 ; -0.094,11.418 ccw(c1.906,11.418) 1.906,9.418 ; -0.094,11.418 ccw(c1.906,11.418) 1.906,9.418 ; -0.094,11.418 -0.094,32.818 ; -0.094,11.418 -0.094,32.818 ; -0.094,32.818 cw(c1.906,32.818) 1.906,34.818 ; -0.094,32.818 cw(c1.906,32.818) 1.906,34.818 ; 0.006,4.018 4.006,0.018 ; 0.006,4.018 4.006,0.018 ; 0.006,37.818 4.006,41.818 ; 0.006,37.818 4.006,41.818 ; 1.906,9.418 5.406,9.418 ; 1.906,9.418 5.406,9.418 ; 1.906,34.818 2.293,34.818 ; 1.906,34.818 2.293,34.818 ; 2.293,34.818 ccw(c5.406,36.418) 4.005,33.211 ; 2.293,34.818 ccw(c5.406,36.418) 4.005,33.211 ; 4.005,33.211 cw(c3.604,32.294) 4.456,32.818 ; 4.005,33.211 cw(c3.604,32.294) 4.456,32.818 ; 4.006,-0.182 ccw(c6.006,-0.182) 6.006,-2.182 ; 4.006,-0.182 ccw(c6.006,-0.182) 6.006,-2.182 ; 4.006,-0.182 4.006,0.018 ; 4.006,-0.182 4.006,0.018 ; 4.006,41.818 4.006,42.018 ; 4.006,41.818 4.006,42.018 ; 4.006,42.018 cw(c6.006,42.018) 6.006,44.018 ; 4.006,42.018 cw(c6.006,42.018) 6.006,44.018 ; 4.006,42.018 4.006,42.018 ; 4.006,42.018 4.006,42.018 ; 4.456,32.818 8.006,32.818 ; 4.456,32.818 8.006,32.818 ; 5.406,9.418 cw(c5.406,5.418) 9.406,5.418 ; 5.406,9.418 cw(c5.406,5.418) 9.406,5.418 ; 6.006,-2.182 35.808,-2.182 ; 6.006,-2.182 35.808,-2.182 ; 6.006,44.018 35.808,44.018 ; 6.006,44.018 35.808,44.018 ; 7.006,39.531 cw(c5.406,36.418) 8.613,37.819 ; 7.006,39.531 cw(c5.406,36.418) 8.613,37.819 ; 7.006,39.531 7.006,39.918 ; 7.006,39.531 7.006,39.918 ; 7.006,39.918 cw(c9.006,39.918) 9.006,41.918 ; 7.006,39.918 cw(c9.006,39.918) 9.006,41.918 ; 8.006,32.818 ccw(c8.006,33.818) 9.006,33.818 ; 8.006,32.818 ccw(c8.006,33.818) 9.006,33.818 ; 8.613,37.819 ccw(c9.53,38.22) 9.006,37.368 ; 8.613,37.819 ccw(c9.53,38.22) 9.006,37.368 ; 9.006,33.818 9.006,37.368 ; 9.006,33.818 9.006,37.368 ; 9.006,41.918 30.408,41.918 ; 9.006,41.918 30.408,41.918 ; 9.406,1.918 ccw(c11.406,1.918) 11.406,-0.082 ; 9.406,1.918 ccw(c11.406,1.918) 11.406,-0.082 ; 9.406,1.918 9.406,5.418 ; 9.406,1.918 9.406,5.418 ; 11.406,-0.082 32.808,-0.082 ; 11.406,-0.082 32.808,-0.082 ; 30.408,41.918 cw(c30.408,39.918) 32.408,39.918 ; 30.408,41.918 cw(c30.408,39.918) 32.408,39.918 ; 32.408,36.418 ccw(c36.408,36.418) 36.408,32.418 ; 32.408,36.418 ccw(c36.408,36.418) 36.408,32.418 ; 32.408,36.418 32.408,39.918 ; 32.408,36.418 32.408,39.918 ; 32.808,-0.082 ccw(c32.808,1.918) 34.808,1.918 ; 32.808,-0.082 ccw(c32.808,1.918) 34.808,1.918 ; 32.808,4.468 cw(c32.285,3.616) 33.201,4.016 ; 32.808,4.468 cw(c32.285,3.616) 33.201,4.016 ; 32.808,4.468 32.808,8.018 ; 32.808,4.468 32.808,8.018 ; 32.808,8.018 cw(c33.808,8.018) 33.808,9.018 ; 32.808,8.018 cw(c33.808,8.018) 33.808,9.018 ; 33.201,4.016 ccw(c36.408,5.418) 34.808,2.305 ; 33.201,4.016 ccw(c36.408,5.418) 34.808,2.305 ; 33.808,9.018 37.358,9.018 ; 33.808,9.018 37.358,9.018 ; 34.808,1.918 34.808,2.305 ; 34.808,1.918 34.808,2.305 ; 35.808,-2.182 ccw(c35.808,-0.182) 37.808,-0.182 ; 35.808,-2.182 ccw(c35.808,-0.182) 37.808,-0.182 ; 35.808,44.018 cw(c35.808,42.018) 37.808,42.018 ; 35.808,44.018 cw(c35.808,42.018) 37.808,42.018 ; 36.408,32.418 39.908,32.418 ; 36.408,32.418 39.908,32.418 ; 37.358,9.018 ccw(c38.21,9.541) 37.81,8.625 ; 37.358,9.018 ccw(c38.21,9.541) 37.81,8.625 ; 37.808,-0.182 37.808,-0.182 ; 37.808,-0.182 37.808,0.018 ; 37.808,-0.182 37.808,0.018 ; 37.808,-0.182 37.808,-0.182 ; 37.808,0.018 41.808,4.018 ; 37.808,0.018 41.808,4.018 ; 37.808,41.818 41.808,37.818 ; 37.808,41.818 37.808,42.018 ; 37.808,41.818 37.808,42.018 ; 37.808,41.818 41.808,37.818 ; 37.81,8.625 cw(c36.408,5.418) 39.521,7.018 ; 37.81,8.625 cw(c36.408,5.418) 39.521,7.018 ; 39.521,7.018 39.908,7.018 ; 39.521,7.018 39.908,7.018 ; 39.908,7.018 ccw(c39.908,9.018) 41.908,9.018 ; 39.908,7.018 ccw(c39.908,9.018) 41.908,9.018 ; 39.908,32.418 cw(c39.908,30.418) 41.908,30.418 ; 39.908,32.418 cw(c39.908,30.418) 41.908,30.418 ; 41.808,4.018 42.008,4.018 ; 41.808,4.018 42.008,4.018 ; 41.808,37.818 42.008,37.818 ; 41.808,37.818 42.008,37.818 ; 41.908,9.018 41.908,30.418 ; 41.908,9.018 41.908,30.418 ; 42.008,4.018 ccw(c42.008,6.018) 44.008,6.018 ; 42.008,4.018 ccw(c42.008,6.018) 44.008,6.018 ; 42.008,37.818 cw(c42.008,35.818) 44.008,35.818 ; 42.008,37.818 cw(c42.008,35.818) 44.008,35.818 ; 44.008,6.018 44.008,35.818 ; 44.008,6.018 44.008,35.818